# Altium PCB mchf_pro_rf.PcbDoc (part 4 of 4)
Units mm, origin at the board's own origin, x right, y up, seen from the top; angles counter-clockwise.
Board outline 200 x 140.01 mm, 2 copper layers (Top Layer, Bottom Layer); 387 components, 251 nets, 1103 pads, 620 vias.
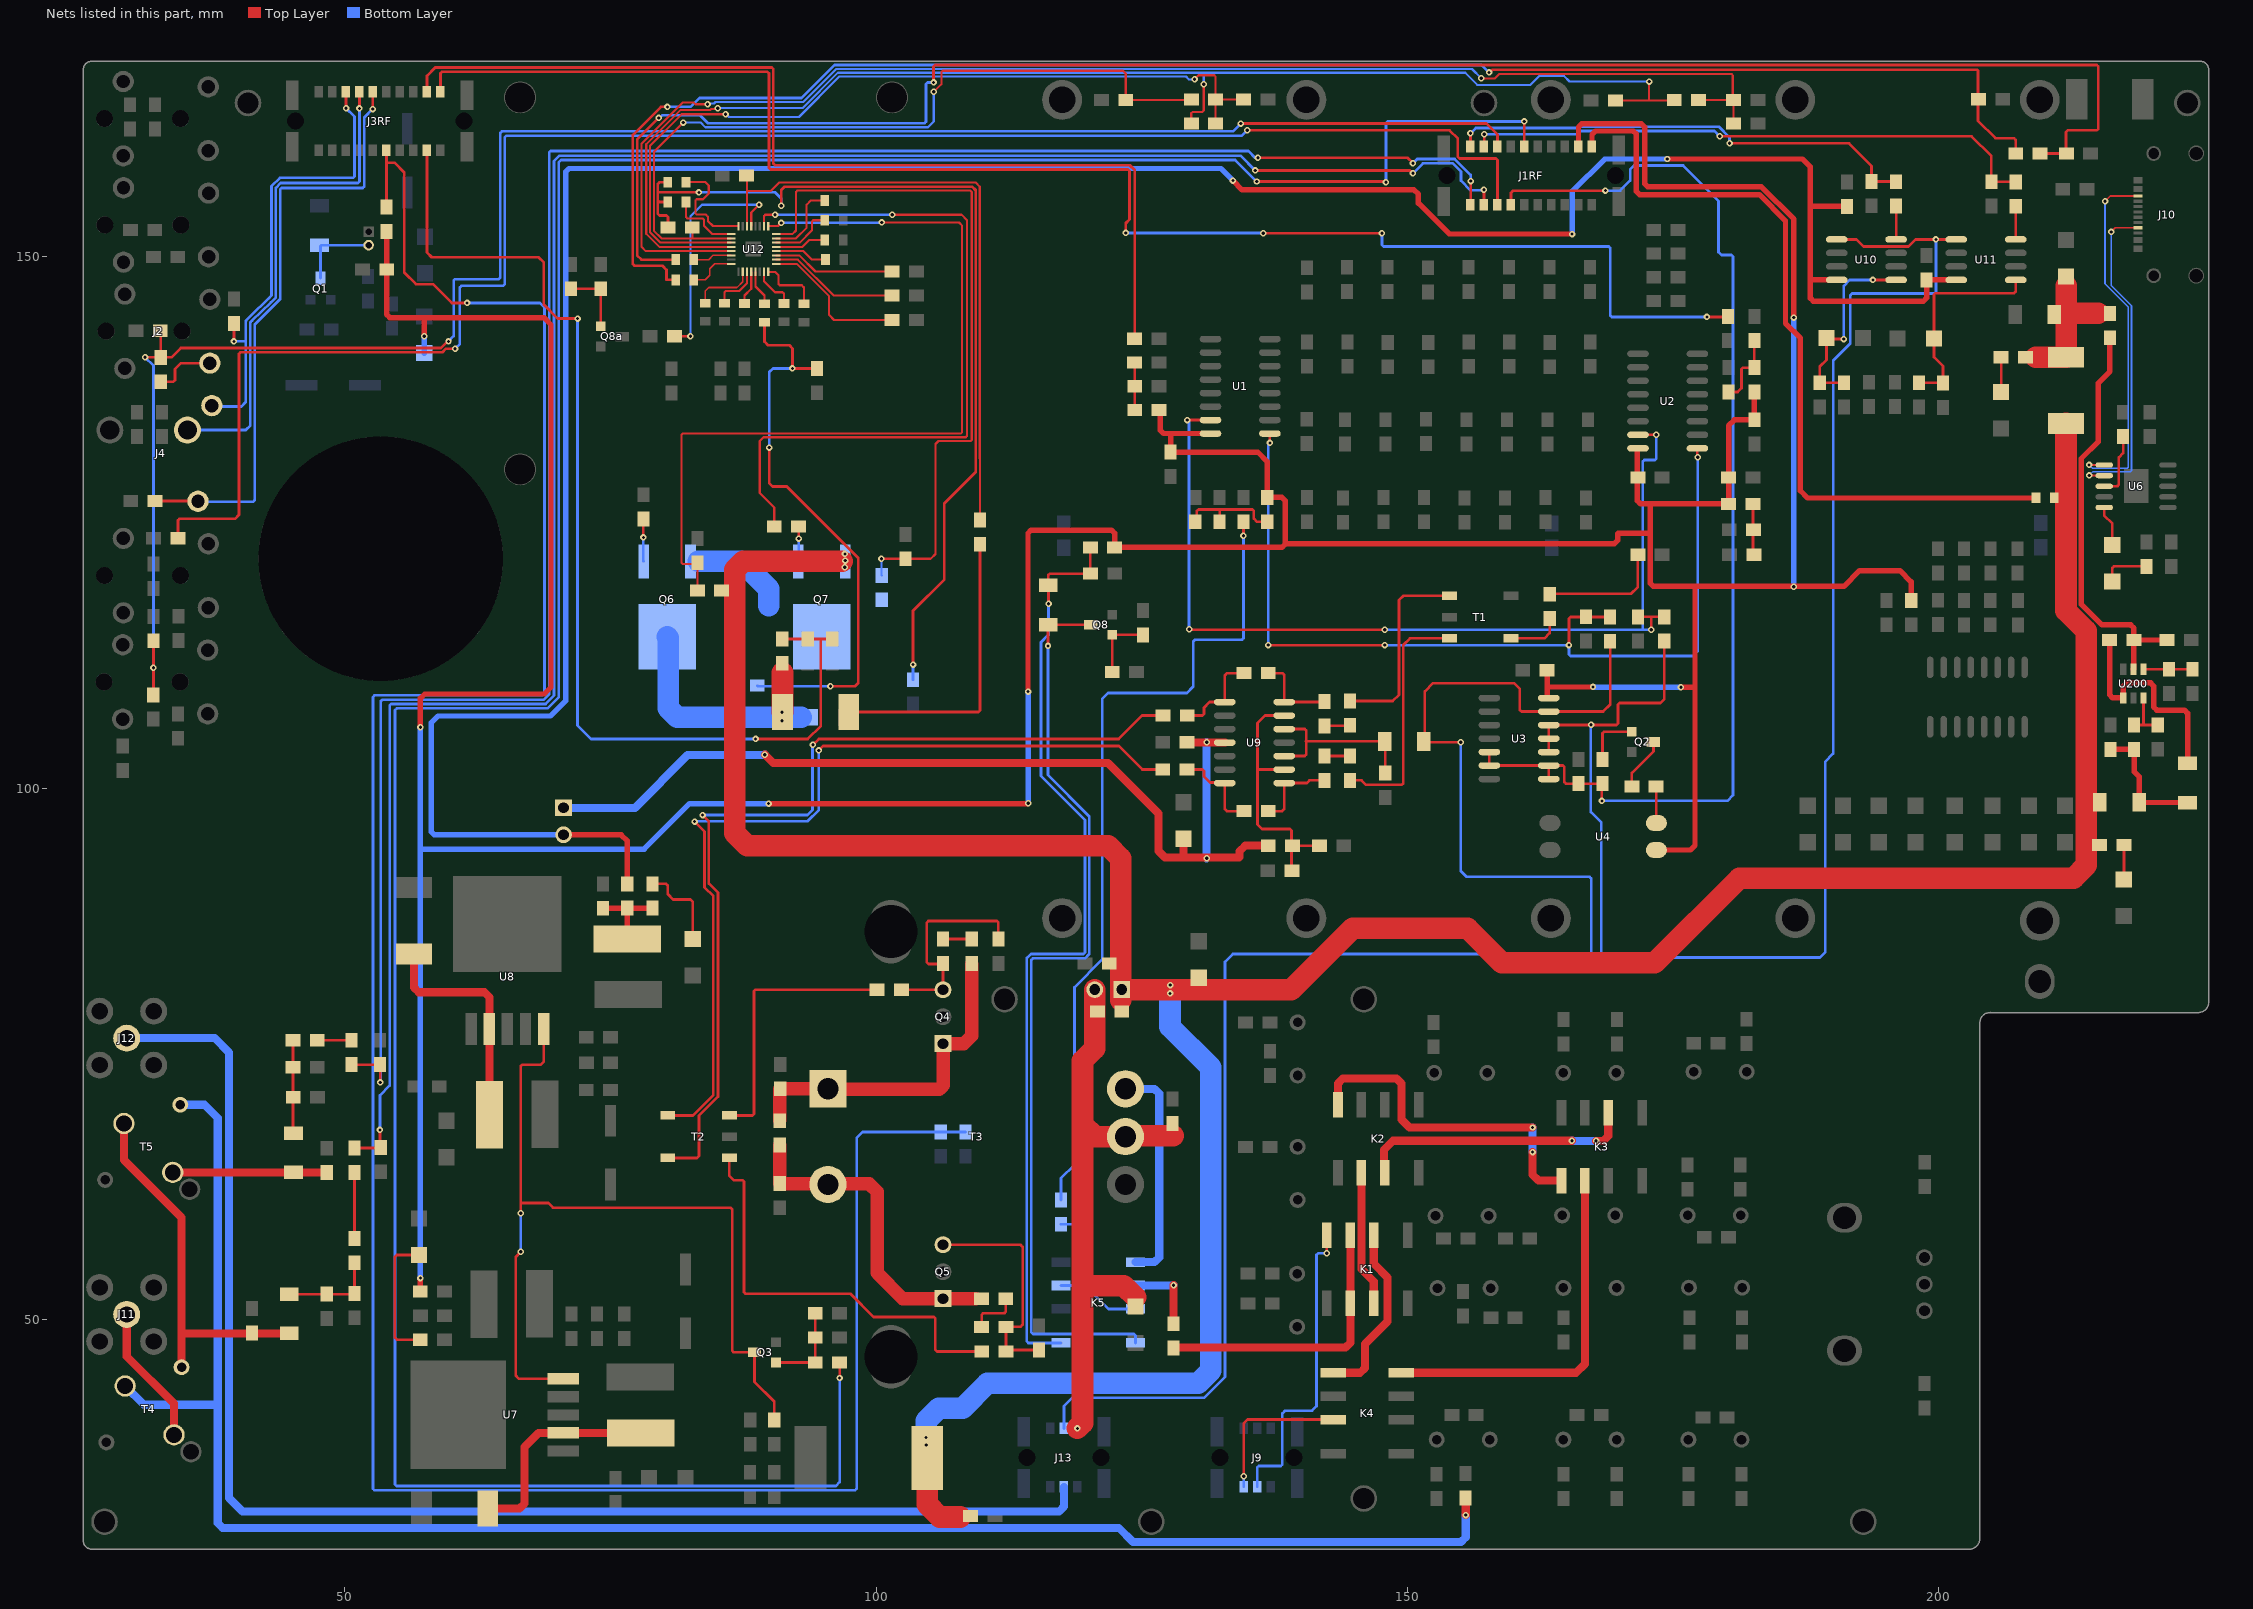
[diagram p3: the nets of this part, all layers, seen from the top]

## Via types
v1: diameter 0.61, hole 0.305, Top Layer to Bottom Layer, 620 vias

## Nets (pads, with @x,y where several pads share a name; then routed paths per layer and width w, separated by ;. In a path a pad name is that pad's centre, name@x,y a point inside that pad or via, vN(x,y) a via of type N, cw(c..) or ccw(c..) an arc to the next point about the centre after c; other vN are vias at no path point) (continued)
NetC89_1: C89.1 M21.2 R38a.2 RFC3.2 | length 7.6
  Top Layer w0.508: C89.1@74.298,88.705 74.302,88.71 M21.2@76.588,88.71 ; RFC3.2@76.6,85.829 76.592,85.837 76.592,88.705 M21.2@76.588,88.71 ; R38a.2@78.978,88.714 78.974,88.71 M21.2@76.588,88.71
NetC90_1: C90.1 Q3.1 R39.2 R40.1 | length 8.3
  Top Layer w0.254: Q3.1@90.593,45.959 94.269,45.959 R39.2@94.285,45.974 94.285,50.584 R40.1@94.276,50.592
NetC91_1: C91.1 T1.4 | length 5.3
  Top Layer w0.254: T1.4@159.745,114.103 162.9,114.103 163.389,114.593 C91.1@163.389,115.96 C91.1@163.347,116.002
NetC91_2: C91.2 M3.1 | length 11.6
  Top Layer w0.254: C91.2@163.389,118.288 171.016,118.288 171.677,118.948 171.677,121.955 M3.1@171.685,121.963
NetC92_1: C92.1 T1.3 | length 22.8
  Top Layer w0.254: C92.1@144.602,100.736 145.689,100.736 146.112,100.313 149.457,100.313 149.606,100.462 149.606,113.466 150.243,114.103 T1.3@153.945,114.103
NetC92_2: C92.2 R45.2 | length 2.4
  Top Layer w0.254: R45.2@142.189,103.022 C92.2@144.602,103.022
NetC93_1: C93.1 T1.1 | length 18.7
  Top Layer w0.254: C93.1@144.602,108.204 148.615,108.204 149.2,108.788 149.2,117.697 149.606,118.103 T1.1@153.945,118.103
NetC93_2: C93.2 R46.2 | length 2.4
  Top Layer w0.254: R46.2@142.189,105.867 144.551,105.867 C93.2@144.602,105.918
NetC94_2: C94.2 R42.2 R43.2 U9.2 U9.6 | length 24.7
  Top Layer w0.254: 135.895,101.752 135.895,96.591 136.322,96.164 138.942,96.164 139.09,96.016 139.09,94.688 R43.2@139.188,94.59 ; U9.2@138.405,101.752 135.89,101.752 135.89,106.121 136.601,106.832 U9.6@138.405,106.832 ; C94.2@139.09,92.233 139.09,94.492 R43.2@139.188,94.59 ; R42.2@141.718,94.587 141.716,94.59 R43.2@139.188,94.59
NetC94a_2: C94a.2 D5.1 U9.3 U9.5 | length 17
  Top Layer w0.254: U9.3@138.405,103.022 140.334,103.022 140.483,103.171 140.483,104.413 ; U9.5@138.405,105.562 140.334,105.562 140.483,105.414 140.483,104.413 ; 140.442,104.413 140.483,104.413 ; C94a.2@147.914,101.417 147.914,104.375 D5.1@147.877,104.413 140.483,104.413
NetC95_2: C95.2 C96.1 R43.1 RFC4.2 U9.11 | length 91.5
  Top Layer w0.762: v1(89.535,103.149) 90.322,102.362 121.818,102.362 126.568,97.612 126.568,94.096 127.192,93.472 128.93,93.472 ; C96.1@128.93,95.25 128.93,93.472 ; C95.2@129.261,104.318 129.273,104.305 132.804,104.305 U9.11@132.817,104.292 ; R43.1@136.902,94.59 134.736,94.59 134.214,94.067 134.214,93.523 134.163,93.472 128.93,93.472
  Bottom Layer w0.762: RFC4.2@70.593,98.153 77.3,98.153 82.273,103.126 89.512,103.126 v1(89.535,103.149) ; v1(131.109,93.412) v1(131.109,104.334)
NetC97_1: C97.1 C99.1 Q4.1 R50.1 | length 20.1
  Top Layer w0.254: C97.1@102.387,81.04 Q4.1@106.3,81.04 106.3,83.454 104.937,83.454 104.775,83.617 104.775,87.351 104.924,87.5 111.363,87.5 111.512,87.351 R50.1@111.512,85.801
NetC97_2: C97.2 T2.3 | length 25.6
  Top Layer w0.254: T2.3@86.198,69.209 88.365,69.209 88.514,69.357 88.514,80.891 88.663,81.04 C97.2@100.101,81.04
NetC98_1: C98.1 C100.1 Q5.1 R51.1 | length 22
  Top Layer w0.254: Q5.1@106.3,57.04 113.572,57.04 113.792,56.82 113.792,49.53 113.578,49.316 C100.1@112.217,49.316 112.226,49.308 C98.1@112.226,47.003 112.353,47.131 R51.1@115.325,47.131
NetC98_2: C98.2 T2.1 | length 40.1
  Top Layer w0.254: T2.1@86.198,65.209 86.198,63.527 86.605,63.119 87.416,63.119 87.564,62.97 87.564,52.583 87.713,52.434 97.571,52.434 99.771,50.234 105.428,50.234 105.577,50.085 105.577,47.151 105.725,47.003 C98.2@109.94,47.003
NetC99_2: C99.2 R52.2 | length 2.7
  Top Layer w0.254: C99.2@106.302,85.809 C99.2@106.31,85.801 R52.2@109.001,85.801
NetC100_2: C100.2 R53.2 | length 4.7
  Top Layer w0.254: C100.2@109.931,49.316 109.931,50.443 110.08,50.592 112.06,50.592 112.209,50.741 R53.2@112.209,51.955
NetC101_2: C101.2 C102.1 Q4.3 R52.1 T3.1 | length 32.1
  Top Layer w1.27: C102.1@90.957,68.732 C101.2@90.957,71.687 ; C101.2@90.983,71.713 T3.1@95.469,71.713 95.495,71.687 105.961,71.687 106.3,72.026 Q4.3@106.3,75.96 108.257,75.96 109.001,76.704 R52.1@109.001,83.452
NetC102_2: C102.2 C103.1 Q5.3 R53.1 T3.3 | length 30.9
  Top Layer w1.27: C103.1@90.932,62.814 C102.2@90.932,66.421 ; C103.1@90.983,62.763 99.357,62.763 100.101,62.019 100.101,54.381 102.523,51.96 Q5.3@106.3,51.96 109.356,51.96 R53.1@109.365,51.969
NetC112_1: C112.1 R57.2 RFC6.1 U10.1 | length 18.6
  Top Layer w0.254: v1(191.063,142.265) 189.535,142.265 C112.1@189.433,142.367 189.433,140.31 188.801,139.677 R57.2@188.801,138.147 191.063,138.147 RFC6.1@191.067,138.151 ; v1(193.802,147.828) U10.1@195.986,147.828
  Bottom Layer w0.254: v1(191.063,142.265) 191.063,147.274 191.618,147.828 v1(193.802,147.828)
NetC113_1: C113.1 R58.2 RFC7.1 U11.1 | length 19.8
  Top Layer w0.254: RFC7.1@198.154,138.151 200.363,138.151 R58.2@200.389,138.125 200.389,139.717 199.551,140.555 C113.1@199.551,142.316 199.551,146.435 199.699,146.583 207.09,146.583 207.239,146.732 U11.1@207.239,147.828
NetC118_1: C118.1 M9k.2 R69.1 | length 172.2
  Top Layer w0.254: v1(79.54,163.073) 79.54,163.048 77.521,161.029 77.521,150.139 77.923,149.737 M9k.2@81.14,149.737 ; v1(105.41,166.409) 105.41,167.899 105.559,168.048 214.862,168.048 215.011,167.899 215.011,162.051 214.862,161.902 212.129,161.902 211.98,161.754 211.98,159.76 R69.1@212.007,159.732 212.005,159.73 C118.1@209.525,159.73
  Bottom Layer w0.254: v1(79.54,163.073) 79.627,163.073 79.867,163.313 83.457,163.313 84.198,162.572 104.549,162.572 104.698,162.721 104.698,166.26 104.847,166.409 v1(105.41,166.409)
NetC118_2: C118.2 M9j.1 R67.1 | length 157.4
  Top Layer w0.254: v1(80.367,164.112) 79.753,164.112 77.114,161.473 77.114,149.31 77.263,149.161 79.889,149.161 80.275,148.775 80.275,147.835 M9j.1@81.14,147.835 ; v1(157.679,167.356) 157.745,167.356 158.006,167.617 203.581,167.617 203.696,167.502 203.696,162.791 205.324,161.163 207.09,161.163 207.239,161.014 C118.2@207.239,159.73
  Bottom Layer w0.254: v1(80.367,164.112) 82.549,164.112 83.383,164.946 92.984,164.946 96.098,168.06 156.975,168.06 v1(157.679,167.356)
NetC119_1: C119.1 C119a.2 R63.1 U12.2 | length 75
  Top Layer w0.203: v1(81.86,162.637) 79.089,159.866 79.089,152.462 79.814,151.737 82.738,151.737 ; C119a.2@82.71,152.757 82.738,152.729 82.738,151.737 ; U12.2@86.358,151.737 82.738,151.737 ; v1(105.435,165.532) 106.148,166.244 106.148,167.394 106.267,167.513 123.241,167.513 123.495,167.259 R63.1@123.495,164.77 129.625,164.77 C119.1@129.666,164.811
  Bottom Layer w0.203: v1(81.86,162.637) 83.489,162.637 83.935,162.191 104.889,162.191 105.435,162.738 v1(105.435,165.532)
NetC119_2: C119.2 C120.1 R64.1 U12.3 | length 79.7
  Top Layer w0.203: v1(85.838,163.422) 81.711,163.422 78.734,160.445 78.734,152.315 79.711,151.337 U12.3@86.36,151.337 ; v1(129.969,166.703) 130.347,167.081 131.833,167.081 131.952,166.962 C119.2@131.952,164.811 ; C120.1@131.952,162.543 C119.2@131.952,164.811 ; R64.1@134.591,164.811 C119.2@131.952,164.811
  Bottom Layer w0.203: v1(85.838,163.422) 85.902,163.422 86.16,163.165 92.747,163.165 96.55,166.968 129.159,166.968 129.424,166.703 v1(129.969,166.703)
NetC119a_1: C119a.1 M9a.1 M9b.1 R63a.1 | length 87.6
  Top Layer w0.254: M9a.1@79.991,155.169 79.619,155.169 79.47,155.317 ; M9b.1@80.397,157.013 79.619,157.013 79.47,156.864 79.47,156.091 ; C119a.1@80.424,152.757 80.424,153.75 80.275,153.899 79.619,153.899 79.47,154.047 79.47,155.317 ; v1(83.337,156.067) 83.314,156.091 79.47,156.091 ; v1(91.076,154.797) 91.076,156.276 91.409,156.609 109.039,156.609 109.381,156.267 109.381,129.765 106.43,126.814 106.43,119.649 103.48,116.699 v1(103.48,111.633) ; 79.47,155.317 79.47,156.091
  Bottom Layer w0.254: v1(83.337,156.067) 90.516,156.067 91.076,155.507 v1(91.076,154.797) ; R63a.1@103.48,110.211 v1(103.48,111.633)
NetC120_2: C120.2 C121.1 R65.1 U12.4 | length 128.2
  Top Layer w0.203: v1(85.094,163.981) 85.03,163.917 84.484,163.917 84.371,163.803 81.589,163.803 78.378,160.593 78.378,152.167 79.608,150.937 U12.4@86.358,150.937 ; C120.2@129.666,162.543 129.666,163.511 129.785,163.63 130.687,163.63 130.835,163.779 v1(130.835,166.247) ; R65.1@169.575,164.719 172.749,164.719 ; v1(172.745,166.497) 172.749,166.494 172.749,164.719 ; C121.1@175.111,164.77 175.06,164.719 172.749,164.719
  Bottom Layer w0.203: v1(85.094,163.981) 85.11,163.997 93.076,163.997 96.403,167.323 130.841,167.323 ; v1(130.835,166.247) 130.841,166.252 130.841,167.323 ; v1(172.745,166.497) 165.258,166.497 164.72,167.034 162.436,167.034 161.588,166.186 156.574,166.186 155.437,167.323 130.841,167.323
NetC121_2: C121.2 C122.1 R66.1 U12.5 | length 132.5
  Top Layer w0.203: v1(84.14,164.362) 82.995,164.362 82.837,164.519 81.802,164.519 77.923,160.64 77.923,150.939 78.324,150.537 U12.5@86.358,150.537 ; v1(156.941,166.811) 156.955,166.797 158.237,166.797 158.639,167.198 180.492,167.198 180.611,167.079 180.611,164.854 R66.1@180.653,164.812 ; C121.2@177.397,164.77 180.611,164.77 R66.1@180.653,164.812 ; C122.1@180.696,162.543 R66.1@180.696,164.77 R66.1@180.653,164.812
  Bottom Layer w0.203: v1(84.14,164.362) 84.204,164.426 84.749,164.426 84.888,164.565 93.142,164.565 96.256,167.679 156.073,167.679 v1(156.941,166.811)
NetC123_2: C123.2 R62.1 U12.30 | length 58.5
  Top Layer w0.203: C123.2@87.817,157.65 87.855,157.612 87.855,156.181 U12.30@87.855,152.896 ; 87.879,156.181 90.072,156.181 90.881,156.99 109.371,156.99 109.762,156.599 109.762,131.039 109.784,131.017 R62.1@109.784,125.239
NetC124_2: C124.2 R71.2 U12.24 | length 66.4
  Top Layer w0.203: U12.24@90.614,152.137 92.116,152.137 92.46,152.482 92.46,156.109 92.579,156.228 108.881,156.228 109,156.109 109,132.783 108.881,132.664 105.867,132.664 105.588,132.385 105.588,122.044 105.135,121.591 C124.2@102.768,121.591 v1(100.505,121.591)
  Bottom Layer w0.203: v1(100.505,121.591) 100.505,120.043 R71.2@100.533,120.015
NetC125_1: C125.1 R73.1 U12.25 | length 80.7
  Top Layer w0.203: R73.1@83.185,118.618 C125.1@83.185,121.209 83.058,121.082 81.803,121.082 81.684,121.201 81.684,133.256 81.803,133.375 107.983,133.375 108.102,133.494 108.102,152.939 107.803,153.238 v1(100.533,153.238) ; U12.25@89.855,152.896 90.78,152.896 v1(91.076,153.193)
  Bottom Layer w0.203: v1(91.076,153.193) 91.099,153.215 100.51,153.215 v1(100.533,153.238)
NetC125a_2: C125a.2 M9d.2 R76a.1 | length 54.5
  Top Layer w0.254: M9d.2@89.497,143.86 89.497,142.024 89.839,141.682 91.838,141.682 92.146,141.374 92.146,139.472 92.167,139.493 C125a.2@94.458,139.493 ; v1(89.941,132.055) 89.941,128.727 90.272,128.397 91.596,128.397 98.323,121.669 98.323,109.88 98.044,109.601 v1(95.707,109.601)
  Bottom Layer w0.254: R76a.1@88.82,109.648 88.868,109.601 v1(95.707,109.601) ; v1(89.941,132.055) 89.941,139.141 90.297,139.497 v1(92.126,139.497)
NetC125e_1: C125e.1 Q8a.1 R76f.1 | length 6.3
  Top Layer w0.254: R76f.1@71.29,146.993 C125e.1@74.092,146.993 Q8a.1@74.092,143.459
NetC129_2: C129.2 D7.2 R80.2 RFC8.2 | length 8.8
  Top Layer w0.254: D7.2@45.136,67.513 45.136,70.917 C129.2@45.136,73.736 RFC8.2@45.136,76.276
NetC130_1: C130.1 D8.2 R82.1 RFC9.2 | length 9.1
  Top Layer w0.254: D8.2@44.78,52.375 50.851,52.375 C130.1@50.927,52.451 RFC9.2@50.927,55.347
NetC132_2: C132.2 Q8.1 R85.2 | length 6.4
  Top Layer w0.254: R85.2@122.225,110.922 Q8.1@122.225,114.427 C132.2@125.12,114.427
NetC133_1: C133.1 D9.2 K5.1 M10.1 | length 89
  Top Layer w0.254: v1(116.23,117.348) 116.23,119.05 D9.2@116.205,119.075 116.205,120.044 116.354,120.193 C133.1@120.167,120.193 120.167,122.655 M10.1@120.163,122.66
  Bottom Layer w0.254: v1(116.23,117.348) 116.23,114.447 115.517,113.733 115.517,101.149 119.654,97.012 119.654,84.55 119.506,84.401 114.573,84.401 114.186,84.014 114.186,47.952 114.335,47.803 K5.1@117.409,47.803
NetC136_1: C136.1 M1.2 | length 77.9
  Top Layer w0.254: v1(134.569,123.749) 134.569,125.076 M1.2@134.571,125.078
  Bottom Layer w0.254: C136.1@117.409,61.254 117.409,63.303 118.669,64.563 118.669,81.264 121.28,83.875 121.28,108.402 121.844,108.966 129.25,108.966 129.845,109.561 129.845,113.821 129.994,113.97 134.42,113.97 134.569,114.119 v1(134.569,123.749)
NetC136_2: C136.2 K5.3 K5.7 | length 15.5
  Bottom Layer w0.254: K5.3@117.409,53.203 119.329,53.203 ; C136.2@117.409,58.968 119.086,58.968 119.38,58.674 119.38,53.254 119.329,53.203 ; K5.7@124.409,51.003 121.87,51.003 119.67,53.203 119.329,53.203
NetC200_2: C200.2 M200.1 RFC200.1 U200.5 | length 39.1
  Top Layer w0.508: M200.1@216.103,142.392 216.103,139.217 215.011,138.125 215.011,132.615 213.396,131.001 213.396,117.328 215.357,115.368 218.06,115.368 218.358,115.07 RFC200.1@218.358,113.943 ; U200.5@218.319,111.201 218.338,111.22 218.338,113.924 RFC200.1@218.358,113.943 ; C200.2@221.474,113.943 RFC200.1@218.358,113.943
NetC201_1: C201.1 D200.2 D202.1 R202.1 | length 12
  Top Layer w0.508: C201.1@216.154,103.657 R202.1@218.379,103.657 218.379,101.559 218.846,101.092 D202.1@218.846,98.679 218.872,98.654 D200.2@223.418,98.654
NetD1_1: D1.1 P1.2 Q1.3 | length 7.6
  Bottom Layer w0.254: Q1.3@47.727,148.006 47.727,151.003 47.777,151.054 47.828,151.105 P1.2@52.248,151.105
NetD3_2: D3.2 L28.1 U7.2 | length 20.5
  Top Layer w0.762: D3.2@63.464,32.227 66.459,32.227 66.906,32.673 66.906,38.001 68.242,39.337 U7.2@70.563,39.337 77.876,39.337 L28.1@77.88,39.334
NetD4_2: D4.2 L29.1 U8.2 | length 21.7
  Top Layer w0.762: D4.2@56.515,84.404 56.515,81.244 56.961,80.797 63.144,80.797 63.612,80.33 U8.2@63.612,77.342 63.612,69.267 L29.1@63.604,69.26
NetD6_2: D6.2 R62.2 | length 28.1
  Top Layer w0.254: D6.2@97.434,107.163 109.635,107.163 109.784,107.311 R62.2@109.784,122.953
NetD7_1: D7.1 R79.2 T5.4 | length 14.5
  Top Layer w0.762: T5.4@33.821,63.852 33.83,63.842 45.124,63.842 45.136,63.83 R79.2@48.311,63.83
NetD8_1: D8.1 R81.1 T4.2 T5.3 | length 35.3
  Top Layer w0.762: T5.3@29.225,68.448 29.225,65.009 34.646,59.588 34.646,48.692 ; T4.2@34.646,45.517 34.646,48.692 ; D8.1@44.78,48.692 34.646,48.692
NetD9_1: D9.1 K5.8 Q8.3 | length 88
  Top Layer w0.254: v1(116.18,113.386) 116.18,115.367 D9.1@116.205,115.392 Q8.3@120.193,115.392
  Bottom Layer w0.254: v1(116.18,113.386) 116.18,101.235 120.061,97.354 120.061,84.38 119.675,83.995 114.759,83.995 114.611,83.846 114.611,48.796 114.759,48.647 124.26,48.647 124.409,48.498 K5.8@124.409,47.803
NetD200_1: D200.1 RFC200.2 U200.1 | length 20.9
  Top Layer w0.508: RFC200.2@216.072,113.943 216.072,108.798 216.369,108.501 U200.1@217.369,108.501 217.369,109.608 217.666,109.906 219.928,109.906 220.226,109.608 220.226,107.644 220.524,107.346 223.121,107.346 223.418,107.049 D200.1@223.418,102.337
NetJ1RF_A11: J1RF.A11 M9.1 | length 74.6
  Top Layer w0.508: J1RF.A11@167.365,160.389 167.365,161.504 167.707,161.846 171.249,161.846 171.546,161.548 171.546,156.152 171.844,155.854 183.114,155.854 185.582,153.387 185.582,143.744 186.969,142.356 186.969,127.991 187.648,127.312 M9.1@209.15,127.312
NetJ2_R: J2.R R15.1 | length 6
  Top Layer w0.254: R15.1@32.689,138.252 33.876,138.252 34.025,138.401 34.025,139.446 34.579,140 J2.R@37.312,140
NetJ9_B2: J9.B2 K1.4 | length 29.6
  Top Layer w0.254: v1(142.418,56.236) 142.418,57.927 K1.4@142.428,57.937
  Bottom Layer w0.254: J9.B2@135.865,34.258 135.865,36.064 136.013,36.213 138.077,36.213 138.226,36.362 138.226,41.151 138.502,41.427 141.021,41.427 141.448,41.855 141.448,56.087 141.597,56.236 v1(142.418,56.236)
NetJ9_B3: J9.B3 K4.7 | length 14.6
  Top Layer w0.254: v1(134.595,35.255) 134.595,40.237 134.949,40.592 K4.7@143.028,40.592
  Bottom Layer w0.254: J9.B3@134.595,34.258 v1(134.595,35.255)
NetJ10_A5: J10.A5 U6.7 | length 31.5
  Top Layer w0.152: v1(214.161,129.437) 214.172,129.426 215.556,129.426 U6.7@215.567,129.415 ; v1(216.23,152.349) 216.611,152.73 J10.A5@218.726,152.73
  Bottom Layer w0.152: v1(214.161,129.437) 214.518,129.794 218.047,129.794 218.136,129.883 218.136,145.407 216.23,147.313 v1(216.23,152.349)
NetJ10_B5: J10.B5 U6.6 | length 34.5
  Top Layer w0.152: v1(214.147,130.415) U6.6@215.567,130.415 ; v1(215.645,155.23) 216.145,155.73 J10.B5@218.726,155.73
  Bottom Layer w0.152: v1(214.147,130.415) 214.167,130.415 214.465,130.116 217.742,130.116 217.832,130.206 217.832,145.281 215.645,147.467 v1(215.645,155.23)
NetJ11_1: J11.1 T4.4 | length 13.2
  Top Layer w0.762: J11.1@29.489,50.48 29.489,46.533 33.938,42.084 T4.4@33.938,39.153
NetJ12_1: J12.1 J13.A2 | length 133.2
  Bottom Layer w0.762: J12.1@29.489,76.48 37.773,76.48 39.116,75.137 39.116,33.223 40.386,31.953 117.232,31.953 117.678,32.4 J13.A2@117.678,34.258
NetK1_2: K1.2 K4.5 | length 17.1
  Top Layer w0.762: K4.5@143.028,44.992 145.557,44.992 146.003,45.438 146.003,47.691 148.135,49.823 148.135,53.97 146.828,55.278 K1.2@146.828,57.937
NetK1_3: K1.3 K1.6 M11.1 | length 27
  Top Layer w0.762: M11.1@127.991,47.32 128.128,47.32 128.181,47.374 144.181,47.374 144.628,47.82 K1.6@144.628,51.537 K1.3@144.628,57.937
NetK1_7: K1.7 K2.6 | length 12.7
  Top Layer w0.762: K2.6@145.669,63.805 145.669,54.744 146.828,53.585 K1.7@146.828,51.537
NetK2_4: K2.4 K3.5 | length 31.8
  Top Layer w0.762: K2.4@143.469,70.205 143.469,72.223 143.916,72.669 148.982,72.669 149.428,72.223 149.428,68.842 150.198,68.072 v1(161.773,68.072) ; v1(161.773,65.761) 161.773,63.627 162.331,63.069 K3.5@164.5,63.069
  Bottom Layer w0.762: v1(161.773,65.761) v1(161.773,68.072)
NetK2_7: K2.7 K3.2 | length 26
  Top Layer w0.762: K2.7@147.869,63.805 147.8,63.874 147.8,65.978 148.649,66.827 v1(165.481,66.827) ; v1(167.754,66.82) 168.446,66.82 168.9,67.275 K3.2@168.9,69.469
  Bottom Layer w0.762: v1(165.481,66.827) 165.488,66.82 v1(167.754,66.82)
NetK3_6: K3.6 K4.4 | length 34.9
  Top Layer w0.762: K4.4@149.428,44.992 165.871,44.992 166.7,45.822 K3.6@166.7,63.069
NetK5_5: K5.5 T3.4 | length 21.2
  Bottom Layer w0.762: T3.4@123.469,71.713 126.198,71.713 126.644,71.266 126.644,55.849 126.198,55.403 K5.5@124.409,55.403
NetK5_6: K5.6 M11.2 | length 7.2
  Top Layer w0.762: M11.2@127.991,49.606 v1(127.991,53.238)
  Bottom Layer w0.762: K5.6@124.409,53.203 127.955,53.203 v1(127.991,53.238)
NetLD1_1: LD1.1 R34h.1 | length 3.3
  Top Layer w0.254: LD1.1@205.867,137.287 R34h.1@205.867,140.555
NetLD2_1: LD2.1 R34g.1 | length 3.3
  Top Layer w0.254: LD2.1@217.399,91.415 217.424,91.44 R34g.1@217.424,94.666
NetLD3_1: LD3.1 R34.1 | length 4.5
  Top Layer w0.254: LD3.1@216.332,119.448 216.332,120.728 216.481,120.876 R34.1@219.532,120.876
NetLD3_2: LD3.2 U6.10 | length 3.9
  Top Layer w0.254: U6.10@215.567,126.415 215.567,125.662 216.332,124.897 LD3.2@216.332,122.877
NetLD4_1: LD4.1 R36A.1 | length 12.4
  Top Layer w0.254: LD4.1@56.984,56.085 56.968,56.069 54.9,56.069 54.712,55.88 54.712,48.311 54.919,48.104 R36A.1@57.109,48.104
NetLD5_1: LD5.1 R38a.1 | length 8.5
  Top Layer w0.254: R38a.1@78.978,91 80.249,91 80.398,90.851 80.398,90.036 80.899,89.535 82.525,89.535 82.756,89.304 LD5.1@82.756,85.798
NetM9a_2: M9a.2 U12.1 | length 6.7
  Top Layer w0.203: M9a.2@82.112,155.169 82.112,153.742 82.231,153.623 83.695,153.623 83.814,153.504 83.814,152.94 84.617,152.137 U12.1@86.36,152.137
NetM9b_2: M9b.2 U12.32 | length 10.6
  Top Layer w0.203: M9b.2@82.112,157.037 83.932,157.037 84.262,156.707 84.262,155.961 83.723,155.423 83.114,155.423 82.995,155.304 82.995,154.097 83.114,153.978 83.971,153.978 84.17,153.78 84.17,153.38 84.653,152.896 U12.32@87.055,152.896
NetM9c_1: M9c.1 U12.23 | length 7.3
  Top Layer w0.203: U12.23@90.614,151.737 92.46,151.737 93.466,152.743 93.466,154.915 93.857,155.305 M9c.1@95.187,155.305
NetM9d_1: M9d.1 U12.13 | length 3
  Top Layer w0.203: U12.13@88.655,148.578 88.655,147.207 89.497,146.365 M9d.1@89.497,145.955
NetM9e_1: M9e.1 U12.12 | length 2.9
  Top Layer w0.203: M9e.1@87.625,145.987 87.625,146.363 88.255,146.993 U12.12@88.255,148.578 U12.12@88.255,148.578
NetM9f_1: M9f.1 U12.11 | length 4.2
  Top Layer w0.203: M9f.1@85.749,146.019 85.749,146.668 85.868,146.787 87.117,146.787 87.855,147.525 U12.11@87.855,148.578
NetM9i_1: M9i.1 U12.21 | length 4.8
  Top Layer w0.203: U12.21@90.614,150.937 93.076,150.937 93.72,151.581 M9i.1@95.187,151.581
NetM9m_2: M9m.2 U12.10 | length 5.6
  Top Layer w0.152: M9m.2@83.932,145.993 83.932,146.787 84.262,147.117 86.906,147.117 87.455,147.666 U12.10@87.455,148.578
NetM9p_1: M9p.1 U12.20 | length 5.2
  Top Layer w0.203: U12.20@90.614,150.537 93.174,150.537 93.974,149.737 M9p.1@95.244,149.737 M9p.1@95.498,149.737
NetM9u_1: M9u.1 U12.22 | length 5.9
  Top Layer w0.203: U12.22@90.614,151.337 92.812,151.337 93.974,152.499 93.974,153.328 94.093,153.447 M9u.1@95.187,153.447
NetM9x_1: M9x.1 U12.16 | length 6
  Top Layer w0.203: U12.16@89.855,148.578 90.499,148.578 90.822,148.255 90.822,147.446 90.941,147.327 93.001,147.327 93.212,147.117 M9x.1@93.212,145.574
NetM9z_1: M9z.1 U12.15 | length 4.2
  Top Layer w0.203: U12.15@89.455,148.578 89.455,147.703 90.49,146.668 91.211,146.668 91.33,146.549 M9z.1@91.33,145.606
NetM12_2: M12.2 T4.3 T5.2 | length 173.7
  Top Layer w0.762: M12.2@155.462,33.215 155.486,33.19 v1(155.486,31.598)
  Bottom Layer w0.762: T4.3@29.342,43.749 31.105,41.986 37.998,41.986 38.049,42.037 ; T5.2@34.528,70.215 36.795,70.215 38.049,68.961 38.049,42.037 ; v1(155.486,31.598) 155.486,29.515 155.04,29.069 124.169,29.069 122.834,30.404 38.496,30.404 38.049,30.85 38.049,42.037
NetM22_1: M22.1 RFC8.1 | length 3.2
  Top Layer w0.254: RFC8.1@47.422,76.276 M22.1@50.648,76.276
NetM23_1: M23.1 RFC9.1 | length 6.2
  Top Layer w0.254: M23.1@50.921,63.848 50.927,63.842 RFC9.1@50.927,57.633
NetQ2_1: Q2.1 R20.1 | length 5.3
  Top Layer w0.254: R20.1@168.351,102.714 168.351,105.16 168.5,105.308 Q2.1@171.12,105.308
NetQ2_3: Q2.3 R19.2 | length 5
  Top Layer w0.254: R19.2@171.12,100.158 171.12,101.422 173.152,103.454 Q2.3@173.152,104.343
NetQ6_1: Q6.1 R70.2 | length 4
  Top Layer w0.254: v1(78.105,123.596) R70.2@78.105,125.324 R70.2@78.13,125.349
  Bottom Layer w0.254: v1(78.105,123.596) 78.105,121.38 Q6.1@78.137,121.348
NetQ6_3: Q6.3 Q7.2 R71.1 | length 9.3
  Bottom Layer w2.032: 83.261,121.348 87.313,121.348 89.891,118.77 89.891,117.153
NetQ7_1: Q7.1 R72.2 | length 3.3
  Top Layer w0.254: v1(92.715,123.495) 92.715,124.617 R72.2@92.704,124.628 R72.2@92.741,124.665
  Bottom Layer w0.254: Q7.1@92.695,121.348 92.715,121.367 v1(92.715,123.495)
NetR1_2: R1.2 R3.2 R4.1 | length 9.8
  Top Layer w0.254: R3.2@130.038,125.078 130.187,125.227 130.187,126.082 130.336,126.23 132.327,126.23 ; R1.2@132.327,125.078 132.327,126.23 ; R4.1@136.804,125.07 135.845,125.07 135.553,125.362 135.553,126.082 135.404,126.23 132.327,126.23
NetR2_2: R2.2 R5.2 R6.1 | length 7
  Top Layer w0.254: R2.2@180.213,137.287 181.077,137.287 181.432,137.643 181.432,139.421 181.585,139.573 R5.2@182.646,139.573 R6.1@182.646,142.113
NetR7_2: R7.2 R8.1 R11.1 | length 4.5
  Top Layer w0.254: R11.1@124.333,140.063 124.333,137.825 R7.2@124.341,137.817 R8.1@124.341,135.582
NetR9_2: R9.2 R10.1 R12.1 | length 4.8
  Top Layer w0.254: R9.2@182.515,126.752 182.515,122.047 R12.1@182.601,121.961
NetR19_1: R19.1 U4.2 | length 3.4
  Top Layer w0.254: R19.1@173.406,100.158 173.427,100.136 U4.2@173.427,96.723
NetR29_1: R29.1 U6.8 | length 6.1
  Top Layer w0.254: U6.8@215.567,128.415 216.793,128.415 216.941,128.563 216.941,131.126 217.345,131.53 R29.1@217.345,133.085
NetR44_1: R44.1 R48.2 U9.14 | length 8.7
  Top Layer w0.254: R48.2@129.261,101.752 130.712,101.752 130.861,101.604 130.861,101.092 131.42,100.533 132.766,100.533 U9.14@132.817,100.482 132.817,98.037 133.012,97.841 R44.1@134.616,97.841
NetR44_2: R44.2 R45.1 U9.1 | length 7.9
  Top Layer w0.254: R44.2@136.902,97.841 138.209,97.841 138.405,98.037 U9.1@138.405,100.482 140.538,100.482 140.792,100.736 R45.1@142.189,100.736
NetR46_1: R46.1 R47.2 U9.7 | length 7.9
  Top Layer w0.254: R47.2@136.902,110.826 138.256,110.826 138.405,110.677 U9.7@138.405,108.102 142.138,108.102 R46.1@142.189,108.153
NetR47_1: R47.1 R49.2 U9.8 | length 8.8
  Top Layer w0.254: R49.2@129.282,106.838 130.712,106.838 130.861,106.987 130.861,107.569 131.394,108.102 U9.8@132.817,108.102 132.817,110.63 133.012,110.826 R47.1@134.616,110.826
NetR48_1: R48.1 T2.4 | length 82.7
  Top Layer w0.254: T2.4@80.398,69.209 82.772,69.209 84.684,71.12 84.684,89.845 83.863,90.666 83.863,95.91 v1(82.916,96.857) ; v1(94.61,103.549) 95.023,103.962 122.841,103.962 125.051,101.752 R48.1@126.975,101.752
  Bottom Layer w0.254: v1(82.916,96.857) 82.948,96.888 93.54,96.888 94.61,97.958 v1(94.61,103.549)
NetR49_1: R49.1 T2.6 | length 87.2
  Top Layer w0.254: T2.6@80.398,65.209 83.141,65.209 83.337,65.405 83.337,69.189 85.119,70.971 85.119,90.172 84.269,91.021 84.269,96.881 v1(83.678,97.472) ; v1(94.061,104.09) 94.611,104.639 122.826,104.639 125.024,106.838 R49.1@126.996,106.838
  Bottom Layer w0.254: v1(83.678,97.472) 93.549,97.472 94.026,97.949 94.026,104.054 v1(94.061,104.09)
NetR55_2: R55.2 U10.4 | length 3.1
  Top Layer w0.254: U10.4@195.986,151.638 R55.2@195.986,154.784
NetR56_2: R56.2 U11.4 | length 3.1
  Top Layer w0.254: U11.4@207.239,151.638 R56.2@207.239,154.762
NetR70a_1: R70a.1 U12.29 | length 22
  Top Layer w0.203: R70a.1@81.02,142.533 v1(82.537,142.533) ; U12.29@88.255,152.896 88.255,154.174 v1(88.989,154.907)
  Bottom Layer w0.203: v1(82.537,142.533) 82.537,153.825 83.619,154.907 v1(88.989,154.907)
NetR72_1: R72.1 U12.26 | length 68.9
  Top Layer w0.203: U12.26@89.455,152.896 89.455,153.836 89.574,153.955 v1(90.499,153.955) ; R72.1@90.418,124.628 90.418,126.422 89.055,127.785 89.055,132.664 89.411,133.02 108.441,133.02 108.56,133.139 108.56,153.447 108.052,153.955 v1(101.515,153.955)
  Bottom Layer w0.203: v1(90.499,153.955) v1(101.515,153.955)
NetR74_1: R74.1 U12.19 | length 11.5
  Top Layer w0.203: U12.19@90.614,150.137 92.777,150.137 94.295,148.619 R74.1@101.515,148.619
NetR75_1: R75.1 U12.18 | length 12.3
  Top Layer w0.203: U12.18@90.614,149.737 92.644,149.737 96.019,146.363 R75.1@101.515,146.363
NetR76_1: R76.1 U12.17 | length 14.1
  Top Layer w0.203: U12.17@90.614,149.337 92.541,149.337 95.58,146.298 95.58,144.526 96.043,144.064 R76.1@101.515,144.064
NetR200_2: R200.2 R201.2 U200.4 | length 4.6
  Top Layer w0.254: U200.4@219.269,111.201 R201.2@221.662,111.201 R200.2@223.886,111.201
NetR202_2: R202.2 R203.1 U200.3 | length 4.8
  Top Layer w0.254: R202.2@218.379,105.943 219.269,105.943 ; U200.3@219.269,108.501 219.269,105.943 ; R203.1@220.603,105.952 220.595,105.943 219.269,105.943
P_DAH: C31.1 J1RF.A18 R15.2 R17.1 R18.1 | length 186.3
  Top Layer w0.254: v1(31.217,140.545) 32.542,140.545 32.612,140.615 R15.2@32.689,140.538 ; R18.1@31.979,108.786 32.002,108.81 v1(32.002,111.339) R17.1@32.002,113.868 ; C31.1@32.639,143.053 32.689,143.003 R15.2@32.689,140.538 ; v1(59.766,142.044) 59.66,142.044 59.043,141.428 34.585,141.428 33.695,140.538 R15.2@32.689,140.538 ; v1(134.327,162.543) 157.451,162.543 158.472,161.522 J1RF.A18@158.472,160.249
  Bottom Layer w0.254: v1(31.217,140.545) 32.002,139.76 v1(32.002,111.339) ; v1(59.766,142.044) 60.255,142.533 60.255,147.755 60.404,147.904 64.493,147.904 64.642,148.053 64.642,161.661 64.791,161.81 133.594,161.81 v1(134.327,162.543)
P_DIT: J1RF.A8 R16.1 | length 167.5
  Top Layer w0.254: R16.1@34.307,123.519 34.307,125.2 34.456,125.349 39.667,125.349 40.048,125.73 40.048,140.873 40.197,141.022 59.212,141.022 59.545,141.355 v1(60.385,141.355) ; v1(134.918,161.908) 153.951,161.908 154.743,161.116 154.743,159.407 154.892,159.258 158.326,159.258 158.475,159.109 J1RF.A8@158.475,154.889
  Bottom Layer w0.254: v1(60.385,141.355) 60.831,141.801 60.831,147.12 60.98,147.269 64.899,147.269 65.048,147.418 65.048,161.243 65.197,161.392 134.402,161.392 v1(134.918,161.908)
PA_BIAS0: C110.1 J1RF.A20 R55.1 | length 44.9
  Top Layer w0.254: J1RF.A20@155.935,160.389 v1(155.935,161.623) ; v1(180.312,160.68) 191.543,160.68 193.675,158.549 C110.1@193.675,157.099 195.957,157.099 R55.1@195.986,157.07
  Bottom Layer w0.254: v1(155.935,161.623) 156.437,162.125 166.005,162.125 166.135,162.255 179.298,162.255 180.312,161.241 v1(180.312,160.68)
PA_BIAS1: C111.2 J1RF.A19 R56.1 | length 54.7
  Top Layer w0.254: J1RF.A19@157.205,160.389 157.226,160.41 v1(157.226,161.541) ; v1(179.384,161.342) 203.1,161.342 204.947,159.496 C111.2@204.947,157.07 207.217,157.07 R56.1@207.239,157.048
  Bottom Layer w0.254: v1(157.226,161.541) 165.996,161.541 166.303,161.849 178.878,161.849 v1(179.384,161.342)
PA_TEMP: C117.1 J3RF.A16 R60.2 R61.1 | length 247.6
  Top Layer w0.254: J3RF.A16@53.926,160.03 53.926,158.863 ; R60.2@53.931,154.682 53.926,154.687 53.926,158.863 ; v1(61.516,145.66) 60.078,145.66 58.309,147.429 56.717,147.429 55.601,148.546 55.601,157.948 54.686,158.863 53.926,158.863
  Bottom Layer w0.254: v1(61.516,145.66) 68.386,145.66 68.809,145.237 68.809,108.975 68.571,108.737 52.803,108.737 52.654,108.589 52.654,34.083 52.803,33.934 98.029,33.934 98.178,34.083 98.178,67.088 98.736,67.647 R61.1@106.091,67.647 C117.1@108.416,67.647
PACK_P: C78.2 C104.1 C105.2 D2a.2 D202.2 M9.2 Q7.3 R34g.2 R54.2 R73.2 RFC1.1 RFC5.1 | length 302.6
  Top Layer w2.032: v1@96.799,121.361 87.491,121.361 86.686,120.556 86.686,95.769 87.877,94.579 121.847,94.579 123.038,93.389 123.038,81.051 123.038,80.028 ; RFC1.1@104.814,36.977 104.814,32.61 106.004,31.42 107.925,31.42 ; RFC5.1@123.114,81.051 127.663,81.051 139.085,81.051 144.848,86.814 155.654,86.814 158.896,83.573 173.278,83.573 181.247,91.542 212.678,91.542 213.868,92.732 213.868,114.79 211.974,116.684 D2a.2@211.974,134.317
  Bottom Layer w2.032: v1(104.724,38.202) 104.724,40.466 105.915,41.656 108.153,41.656 110.49,43.993 130.305,43.993 131.496,45.183 131.496,73.736 127.663,77.569 v1(127.663,80.693)
  other v1: 104.699,38.913 127.679,81.471 97.06,120.782 97.096,121.415 97.074,122.044
"PHONES L": C32.1 J3RF.A5 J4.T | length 57
  Top Layer w0.254: C32.1@32.156,127.025 36.17,127.025 J4.T@36.195,127 ; v1(52.633,163.91) 52.633,165.53 J3RF.A5@52.656,165.53
  Bottom Layer w0.254: J4.T@36.195,127 36.246,126.949 41.38,126.949 41.529,127.098 41.529,143.612 43.926,146.009 43.926,156.323 44.075,156.471 51.689,156.471 51.838,156.62 51.838,163.116 v1(52.633,163.91)
"PHONES R": C33.2 J3RF.A3 J4.R | length 44.2
  Top Layer w0.254: v1(39.573,142.044) C33.2@39.573,143.739 ; v1(50.124,163.982) 50.124,165.598 50.2,165.674 J3RF.A3@50.216,165.659
  Bottom Layer w0.254: J4.R@37.495,136 37.58,135.915 40.284,135.915 40.691,136.322 40.691,142.044 ; v1(39.573,142.044) 40.691,142.044 ; v1(50.124,163.982) 50.913,163.193 50.913,157.586 50.765,157.437 43.891,157.437 43.113,156.659 43.113,146.356 42.875,146.118 41.103,144.401 40.716,144.015 40.691,143.884 40.691,142.044
PTT: C25.1 M7.2 U1.1 U2.1 | length 87
  Top Layer w0.254: v1(136.902,113.466) v1(147.877,113.466) ; v1(137.058,132.486) 137.058,133.37 137.056,133.373 U1.1@137.058,133.375 ; v1(165.202,113.466) 165.202,115.968 165.35,116.117 M7.2@169.055,116.117 ; U2.1@177.286,131.982 177.285,131.98 177.285,131.173 v1(177.317,131.14)
  Bottom Layer w0.254: v1(136.902,113.466) 136.902,132.33 v1(137.058,132.486) ; v1(147.877,113.466) v1(165.202,113.466) 165.202,112.595 165.35,112.446 176.86,112.446 177.317,112.903 v1(177.317,131.14)
PTT_3V: C38.1 J1RF.A7 R20.2 U3.5 U3.6 U3.8 U3.9 | length 109.7
  Top Layer w0.254: U3.5@157.709,103.403 U3.6@157.709,102.133 U3.9@163.297,102.133 ; J1RF.A7@159.745,154.889 159.745,156.019 159.959,156.233 v1(168.63,156.233) ; U3.8@163.297,100.863 U3.9@163.297,102.133 ; v1(168.3,98.806) 168.3,100.377 R20.2@168.351,100.428 C38.1@166.091,100.428 164.916,100.428 164.768,100.577 164.768,101.985 164.619,102.133 U3.9@163.297,102.133
  Bottom Layer w0.254: v1(168.3,98.806) 180.101,98.806 180.645,99.35 180.645,150.016 180.496,150.165 179.553,150.165 179.278,150.439 179.278,155.259 175.945,158.591 171.323,158.591 170.966,158.234 170.966,157.181 170.017,156.233 v1(168.63,156.233)
PTT_5V: D5.2 J13.B2 M7.1 U3.13 | length 158.4
  Top Layer w0.254: D5.2@151.56,104.413 151.638,104.334 v1(155.016,104.334) ; D5.2@151.638,104.413 151.638,109.118 152.4,109.88 160.02,109.88 160.579,109.322 160.579,107.366 160.731,107.213 U3.13@163.297,107.213 168.424,107.213 169.088,107.877 169.088,113.798 M7.1@169.055,113.831
  Bottom Layer w0.254: J13.B2@117.678,39.758 117.678,41.851 118.457,42.63 130.876,42.63 132.834,44.588 132.834,83.664 133.574,84.404 167.146,84.404 167.295,84.553 167.295,91.52 167.146,91.669 155.55,91.669 155.016,92.202 v1(155.016,104.334)
PTT_N: C26.1 M8.2 U1.15 U2.15 | length 90.2
  Top Layer w0.254: v1(129.293,134.64) 129.296,134.643 131.468,134.643 U1.15@131.47,134.645 ; v1(129.464,114.96) 129.515,114.91 v1(147.877,114.91) ; U2.15@171.698,133.252 171.713,133.267 173.42,133.267 v1(173.424,133.263) ; C26.1@171.704,116.125 172.933,116.125 ; v1(172.946,114.916) 172.933,114.929 172.933,116.125 ; M8.2@174.162,116.125 172.933,116.125
  Bottom Layer w0.254: v1(129.293,134.64) 129.454,134.479 129.454,114.97 v1(129.464,114.96) ; v1(147.877,114.91) 172.15,114.91 ; v1@172.898,114.91 172.15,114.91 ; v1(173.424,133.263) 173.424,131.035 173.275,130.886 172.299,130.886 172.15,130.737 172.15,114.91
PTT_N5V: M8.1 U3.10 U3.11 U3.12 U10.5 U11.5 | length 152
  Top Layer w0.254: U3.10@163.297,103.403 U3.11@163.297,104.673 U3.12@163.297,105.943 169.676,105.943 169.824,106.092 169.824,107.877 169.973,108.026 173.821,108.026 174.176,108.382 174.176,113.825 M8.1@174.162,113.839 ; U10.5@190.398,151.638 192.253,151.638 192.913,150.978 197.155,150.978 197.815,151.638 v1(199.733,151.638) U11.5@201.651,151.638
  Bottom Layer w0.254: v1(167.286,105.962) 167.259,105.935 167.259,97.759 168.25,96.768 168.25,84.528 168.711,84.066 188.816,84.066 189.306,84.557 189.306,102.486 190.066,103.246 190.066,103.347 190.068,103.349 190.068,140.259 191.668,141.859 191.668,146.382 191.829,146.543 199.584,146.543 199.733,146.692 v1(199.733,151.638)
PWR_FWD: C127.2 J1RF.A10 M22.2 | length 198.2
  Top Layer w0.254: M22.2@50.648,73.99 C127.2@53.333,73.99 53.34,73.983 v1(53.34,72.314) ; v1(135.928,159.326) 150.026,159.326 v1@150.52,158.831 ; J1RF.A10@155.935,154.889 155.955,154.91 v1(155.955,157.131)
  Bottom Layer w0.254: v1(53.34,72.314) 53.391,72.365 53.391,108.182 53.54,108.331 68.739,108.331 69.24,108.833 69.24,159.82 69.389,159.969 135.026,159.969 135.67,159.326 v1(135.928,159.326) ; v1(150.517,158.804) 150.924,159.21 154.445,159.21 155.955,157.7 v1(155.955,157.131)
PWR_RET: C128.1 J1RF.A9 M23.2 | length 202.4
  Top Layer w0.254: M23.2@50.921,66.134 53.333,66.134 53.315,66.152 v1(53.315,67.843) ; v1(135.683,158.128) 150.25,158.128 v1(150.517,157.861) ; J1RF.A9@157.205,154.889 v1(157.205,156.312)
  Bottom Layer w0.254: v1(53.315,67.843) 53.315,71.095 54.229,72.009 54.229,107.776 54.378,107.925 68.907,107.925 69.698,108.715 69.698,159.024 70.193,159.519 134.292,159.519 v1(135.683,158.128) ; v1(150.517,157.861) 151.46,158.804 154.276,158.804 155.042,158.039 155.042,157.168 155.95,156.259 157.152,156.259 v1(157.205,156.312)
RX_QSD_IN: J3RF.A10 M4.1 | length 146
  Top Layer w0.254: J3RF.A10@59.006,165.53 59.006,167.263 59.155,167.411 89.774,167.411 89.923,167.263 89.923,158.364 90.072,158.215 123.702,158.215 123.85,158.066 123.85,153.518 123.495,153.162 v1(123.495,152.248) ; v1(136.423,152.222) v1(147.599,152.222) ; v1(178.181,144.348) 180.111,144.348 M4.1@180.162,144.399
  Bottom Layer w0.254: v1(123.495,152.248) 136.398,152.248 v1(136.423,152.222) ; v1(147.599,152.222) 147.599,151.117 147.748,150.968 168.939,150.968 169.088,150.819 169.088,144.497 169.237,144.348 v1(178.181,144.348)
"SPK RET": J3RF.A4 J4.B | length 46
  Top Layer w0.254: v1(51.385,163.971) 51.385,165.529 J3RF.A4@51.386,165.53
  Bottom Layer w0.254: J4.B@35.195,133.7 40.691,133.7 41.123,134.132 41.123,143.741 41.123,143.846 41.271,143.995 43.043,145.712 43.52,146.188 43.52,156.491 43.978,156.949 51.236,156.949 51.385,157.098 v1(51.385,163.971)
SRN: M9k.1 U12.6 | length 3.7
  Top Layer w0.152: M9k.1@82.855,149.737 84.262,149.737 84.662,150.137 U12.6@86.358,150.137
SRP: M9j.2 U12.8 | length 4.5
  Top Layer w0.152: M9j.2@82.855,147.835 83.932,147.835 84.353,148.257 84.353,148.869 84.821,149.337 U12.8@86.358,149.337
TRX_20V: C106.2 C107.1 J13.B3 R54.1 RFC5.2 T3.2 | length 56.5
  Top Layer w2.032: v1(118.948,39.758) 119.428,40.237 119.428,53.188 ; RFC5.2@120.574,81.051 120.574,78.994 120.574,75.507 119.428,74.361 119.428,68.403 ; 124.409,52.095 123.317,53.188 119.428,53.188 ; 127.965,67.31 123.567,67.31 T3.2@123.469,67.213 120.618,67.213 119.428,68.403 ; 119.428,53.188 119.428,68.403
TX_MIX: J3RF.A9 M2.2 | length 93.5
  Top Layer w0.254: J3RF.A9@57.736,165.53 57.736,167.032 58.522,167.818 90.181,167.818 90.33,167.669 90.33,158.77 90.478,158.621 123.874,158.621 124.341,158.154 124.341,142.299 M2.2@124.333,142.291
USB_20V: D2.2 D2a.1 F1.1 M200.2 R34h.2 | length 12.6
  Top Layer w2.032: 209.15,140.555 D2a.1@211.98,140.555 211.98,144.678 ; 211.98,147.289 211.98,144.678 ; 215.011,144.678 211.98,144.678
VBAT: C500.1 J3RF.A19 R500.2 R501.1 | length 103.8
  Top Layer w0.254: J3RF.A19@57.736,160.03 57.736,150.417 58.191,149.962 68.245,149.962 68.739,149.468 68.739,145.492 70.035,144.196 v1(71.907,144.196) ; v1(88.663,104.639) 93.565,104.639 94.799,105.873 94.799,114.046 ; R500.2@91.179,114.046 94.799,114.046 ; C500.1@95.882,114.054 95.873,114.046 94.799,114.046
  Bottom Layer w0.254: v1(71.907,144.196) 71.907,105.918 73.186,104.639 v1(88.663,104.639)
VBAT_F: D6.1 F2.2 Q6.2 R500.1 | length 23.3
  Top Layer w2.032: 91.186,110.871 91.196,110.861 D6.1@91.196,107.168
  Bottom Layer w2.032: Q6.2@80.337,114.248 80.453,114.132 80.453,107.518 81.291,106.68 92.964,106.68
  other v1: 91.161,106.35 91.161,107.137
VCC_5V: C1.1 C2.1 C27.1 C28.1 C38a.1 C116.2 J1RF.A12 M10.2 M13.2 M20.1 R4.2 R5.1 R8.2 R9.1 R13a.1 R60.1 U1.16 U2.16 U3.14 U4.1 | length 472.2
  Top Layer w0.508: R60.1@53.95,152.396 53.95,144.578 54.248,144.28 57.48,144.28 ; M20.1@57.109,52.648 57.117,52.656 57.117,53.891 v1(57.125,53.899) ; v1(57.125,105.74) 57.125,108.458 57.531,108.864 68.775,108.864 69.409,109.498 69.409,143.61 68.739,144.28 57.48,144.28 ; v1(57.48,142.533) 57.48,144.28 ; v1(89.891,98.552) 114.288,98.552 v1(114.325,98.589) ; v1(114.3,109.093) 114.3,123.991 114.598,124.289 122.151,124.289 122.449,123.991 M10.2@122.449,122.66 138.191,122.66 138.489,122.957 138.489,123.012 ; R8.2@126.627,135.582 126.746,135.463 126.746,133.673 127.044,133.375 127.715,133.375 ; U1.16@131.47,133.375 127.715,133.375 ; C38a.1@163.144,111.1 163.144,109.576 ; U3.14@163.297,108.483 163.191,108.483 163.144,108.53 163.144,109.576 ; J1RF.A12@166.095,160.389 166.095,162.208 166.393,162.506 172.024,162.506 172.321,162.208 172.321,156.888 172.619,156.59 183.313,156.59 186.36,153.543 v1(186.36,144.287) ; v1(167.462,109.525) 163.195,109.525 163.144,109.576 ; U2.16@171.698,131.982 171.691,131.982 171.644,131.935 171.644,127.05 171.941,126.752 172.842,126.752 ; U4.1@173.427,94.183 176.632,94.183 177.063,94.615 177.063,109.525 ; v1(175.743,109.499) 177.038,109.499 177.063,109.525 ; R5.1@182.646,137.287 R5.1@182.646,137.287 182.647,134.665 C27.1@182.648,134.664 180.761,134.664 180.229,134.132 C28.1@180.229,129.225 R9.1@180.229,126.752 172.842,126.752 ; M13.2@197.406,117.67 197.406,119.408 196.342,120.472 192.557,120.472 191.084,118.999 177.063,118.999 ; 127.715,133.375 127.715,131.627 C1.1@127.711,131.623 135.915,131.623 136.804,130.734 R4.2@136.804,127.356 136.817,127.368 138.191,127.368 138.489,127.071 138.489,123.012 ; 138.489,123.012 169.476,123.012 169.774,123.31 169.774,123.927 169.824,123.977 172.842,123.977 ; 172.842,123.977 172.842,126.752 ; 172.842,123.977 172.842,119.297 173.14,118.999 177.063,118.999 ; 177.063,109.525 177.063,118.999
  Bottom Layer w0.508: v1(57.125,53.899) 57.125,94.262 ; v1(57.125,105.74) 57.125,94.262 ; R13a.1@57.48,140.945 v1(57.48,142.533) ; v1(89.891,98.552) 82.462,98.552 78.172,94.262 57.125,94.262 ; v1(114.3,109.093) 114.325,109.068 v1(114.325,98.589) ; v1(167.462,109.525) 167.475,109.512 175.73,109.512 v1(175.743,109.499) ; v1(186.36,118.948) v1(186.36,144.287)
VCC_8V: C108.1 C109.1 M21.1 RFC4.1 U10.8 U11.8 | length 256.5
  Top Layer w0.508: RFC4.1@70.593,95.613 76.019,95.613 76.592,95.04 M21.1@76.592,91 ; v1(133.579,157.175) 134.442,156.312 150.622,156.312 151.028,155.905 151.028,155.061 153.943,152.147 v1(165.498,152.147) ; v1(174.447,159.207) 187.173,159.207 187.909,158.471 187.909,154.754 ; U10.8@190.398,147.828 187.909,147.828 ; C108.1@191.207,154.593 C108.1@191.368,154.754 187.909,154.754 ; U11.8@201.651,147.828 C109.1@198.857,147.828 198.857,146.131 198.547,145.821 188.207,145.821 187.909,146.119 187.909,147.828 ; 187.909,147.828 187.909,154.754
  Bottom Layer w0.508: RFC4.1@70.593,95.613 58.438,95.613 58.141,95.911 58.141,106.147 58.788,106.794 69.362,106.794 70.815,108.248 70.815,158.021 71.113,158.318 132.443,158.318 v1@133.594,157.168 ; v1(165.498,152.147) 165.498,156.133 168.576,159.21 174.444,159.21 v1(174.447,159.207)
VCC_58V_ON: J1RF.A16 R39.1 | length 292.2
  Top Layer w0.254: v1(96.571,44.501) R39.1@96.571,45.974 ; v1(135.813,157.089) 147.838,157.089 147.904,157.023 v1(147.98,157.023) ; v1(160.998,162.738) 160.998,160.406 J1RF.A16@161.015,160.389
  Bottom Layer w0.254: v1(96.571,44.501) 96.571,34.696 96.215,34.341 54.886,34.341 54.737,34.49 54.737,107.34 54.915,107.518 69.076,107.518 70.155,108.597 70.155,158.907 70.361,159.113 133.789,159.113 v1(135.813,157.089) ; v1(147.98,157.023) 147.98,162.589 148.129,162.738 v1(160.998,162.738)
VCC_58V_ON_DIRTY: Q3.3 R41.1 U7.5 U8.5 | length 82
  Top Layer w0.254: v1(66.563,56.372) 66.102,55.912 66.102,44.711 66.371,44.443 U7.5@70.563,44.443 ; v1@66.563,60.039 66.563,60.96 ; U8.5@68.717,77.342 68.717,74.246 68.454,73.983 66.711,73.983 66.563,73.834 66.563,60.96 ; R41.1@90.426,40.551 90.426,42.263 88.561,44.128 Q3.3@88.561,46.924 86.605,46.924 86.457,47.073 86.457,60.379 86.308,60.528 69.606,60.528 69.174,60.96 66.563,60.96
  Bottom Layer w0.254: v1(66.563,56.372) v1(66.563,56.372) 66.564,59.995 v1(66.566,59.997)
pads on no net: J1RF.MH1 J1RF.MH2 J2.0 J3RF.MH1 J3RF.MH2 J5.0 J6.0 J7.0 J8.0 J9.A1 J9.A2 J9.A3 J9.MH1 J9.MH2 J10.A8 J10.B8 J10.MH3 J10.MH4 J10.MH5 J10.MH6 J13.B1 J13.MH1 J13.MH2 K5.2 M9i.2 M9p.2 M9u.2 M9x.2 M9z.2 TF1.1 TF1.2 TF1.3 U5.10 U5.11 U6.2 U6.3 U6.9 U9.9 U9.10 U9.12 U9.13 U12.27 U12.28 U12.31 U200.6
copper on no net: | length 0

## Polygon pours and split planes (outlines as drawn)
GND on Top Layer "top" (solid, remove dead copper, pour order 0): 25.408,168.403 25.579,28.397 225.405,28.397 225.4,168.403
GND on Bottom Layer "btm" (solid, remove dead copper, pour order 2): 25.425,168.378 25.425,28.321 225.425,28.397 225.183,98.41 225.425,168.403

## Keep-outs
Keep-Out Layer:
  circle w0.127: c53.391,121.59 r11.735
  lines w0.127: 202.86,28.392 ccw(c202.872,29.38) 203.86,29.367 ; 202.86,28.397 26.188,28.396 cw(c26.188,29.185) 25.4,29.185 25.4,167.615 cw(c26.188,167.615) 26.188,168.403 224.612,168.403 cw(c224.612,167.615) 225.4,167.615 225.4,79.862 ; 203.864,77.926 203.864,77.931 ; 203.869,29.394 203.869,77.945 ; 203.87,77.931 cw(c204.846,77.919) 204.858,78.895 ; 204.846,78.89 224.405,78.89 ; 224.399,78.887 ccw(c224.411,79.875) 225.399,79.862

## Other copper
Bottom Layer:
  region net NetQ6_3: 88.313,117.704 88.313,110.49 101.702,110.49 101.702,110.541 101.702,117.704
  region net VBAT_F: 73.758,117.754 73.758,110.541 87.147,110.541 87.147,110.592 87.147,117.754

## Silkscreen, mask and mechanical layers (free items; w line width, h text height)
Top Overlay:
  circle w0.508: c209.5,81.813 r2.428
  circle w1: c66.5,130 r1.7
  circle w0.8: c145.898,33.164 r1.486
  circle w0.8: c112.09,80.142 r1.486
  circle w0.8: c145.898,80.142 r1.486
  circle w1: c66.5,165 r1.7
  circle w1: c101.5,165 r1.7
  lines w0.254: 35.878,103.671 ccw(c37.394,103.485) 37.58,101.969 ; 35.878,138.979 cw(c37.411,139.034) 37.543,140.562 ; 35.881,103.768 35.881,121.576 ; 35.881,138.979 35.89,135.128 ; 37.509,140.557 69.146,140.557 ; 37.575,101.96 69.408,101.96 ; 69.09,140.563 cw(c68.989,138.632) 70.911,138.83 ; 69.408,101.969 ccw(c69.354,103.531) 70.917,103.478 ; 70.917,103.531 70.917,138.83 ; 89.734,118.499 97.18,118.499 ; 114.986,88.247 72.568,88.247 72.568,167.208 150.52,167.208 150.52,88.24 142.781,88.235 ; 119.659,88.235 138.209,88.235 ; 89.713,110.554 90.184,110.084 96.626,110.084 97.18,110.638 97.18,119.645 96.468,120.358 90.205,120.358 89.713,119.866 89.713,110.554
  lines w0.508: 26.922,86.208 26.922,93.345 52.299,93.345 52.299,86.208 26.922,86.208
  text "mix pcb above" at 73.152,166.057 h0.81
  text "speaker clearout" at 56.82,139.412 h0.81
  text "VBAT" at 91.77,119.024 h0.81
  text "mcHF Pro QRP Transceiver" at 30.089,91.516 h0.81
  text "RF board rev 0.8.5 08 Nov 2024" at 27.788,89.459 h0.81
  text "Krassi Atanassov, M0NKA" at 30.505,87.478 h0.81
  text "GND" at 202.362,80.975 h1.52
Bottom Overlay:
  circle w0.508: c209.5,81.813 r2.431
  circle w0.8: c157.205,164.48 r1.486
  circle w0.8: c40.9,164.48 r1.486
  circle w0.8: c223.396,164.48 r1.486
  circle w0.8: c125.9,30.98 r1.486
  circle w0.8: c27.4,30.98 r1.486
  circle w0.8: c192.9,30.98 r1.486
  lines w0.254: 130.124,83.07 130.124,45.733 141.705,45.733 ; 130.15,83.071 141.73,83.071 ; 141.684,45.72 141.684,83.071 ; 148.721,56.129 186.919,56.211 ; 148.768,69.963 186.919,70.045 ; 148.772,41.955 186.919,42.037 ; 148.874,28.951 186.983,28.951 186.983,83.921 186.89,84.015 148.768,83.933 ; 148.768,83.933 109.576,83.933 109.576,28.931 148.768,28.931 148.768,83.933
  text "30/20m LPF" at 139.559,81.661 h0.81
  text "GND" at 206.4,80.975 h1.52
  text "160m LPF" at 186.385,79.756 h0.81 r90
  text "60/40m LPF" at 186.563,66.827 h0.81 r90
  text "80m LPF" at 186.487,51.308 h0.81 r90
  text "17-10m LPF" at 186.487,39.497 h0.81 r90
  text "trsv pcb above" at 121.255,29.543 h0.81
Bottom Solder:
  drawing of 76 lines, arcs and shapes, not listed
Mechanical 1:
  lines w0.127: 25.4,28.394 225.4,28.394 ; 25.4,28.396 25.4,168.403 ; 25.4,98.476 225.4,98.476 ; 25.4,168.402 225.4,168.402 ; 225.4,28.396 225.4,168.403
  text "ToDo: Add testpoints" at 223.008,173.003 h0.81
Mechanical 20:
  lines w0.254: 27.4,30.98 192.9,30.963 ; 40.9,164.48 223.396,164.48

## Dimensions
25.4,98.476 to 29.489,50.48 on Mechanical 1
29.489,76.48 to 25.4,98.476 on Mechanical 1
26.518,98.552 to 27.4,163 on Mechanical 1
26.518,98.552 to 27.425,153 on Mechanical 1
45.009,98.552 to 27.552,143 on Mechanical 1
42.139,98.603 to 25.755,131.5 on Mechanical 1
27.409,120 to 20.853,98.527 on Mechanical 1
27.348,110 to 19.736,98.476 on Mechanical 1
223.977,98.4 to 225.4,78.918 on Mechanical 1
223.396,164.48 to 40.9,164.48 on Mechanical 16
223.396,164.48 to 225.4,168.403 on Mechanical 16
223.396,164.48 to 225.4,98.476 on Mechanical 16
225.4,98.476 to 227.711,153.98 on Mechanical 16
27.4,30.98 to 26.188,28.396 on Mechanical 16
125.9,30.98 to 192.9,30.98 on Mechanical 16
125.9,30.98 to 27.4,30.98 on Mechanical 16
25.4,98.476 to 27.4,30.98 on Mechanical 16
43.396,167.58 to 25.4,168.403 on Mechanical 1
171.545,152.839 to 225.4,168.403 on Mechanical 1
63.186,157.98 to 25.4,98.476 on Mechanical 1
171.545,152.839 to 225.4,98.476 on Mechanical 1
72.568,167.208 to 151.409,167.208 on Mechanical 15
72.568,167.208 to 25.4,167.615 on Mechanical 15
188.604,53.332 to 203.81,28.397 on Mechanical 1
188.604,53.332 to 225.4,28.394 on Mechanical 1
225.577,130.099 to 223.058,167.52 on Mechanical 1
53.391,121.59 to 21.311,98.527 on Mechanical 1
26.518,98.552 to 25.4,28.394 on Mechanical 1
225.4,168.402 to 225.4,28.394 on Mechanical 1
25.4,168.403 to 225.4,168.403 on Mechanical 1